# EAGLE board LED glow with HC-SR04 PCB (EAGLE 9.7.0)
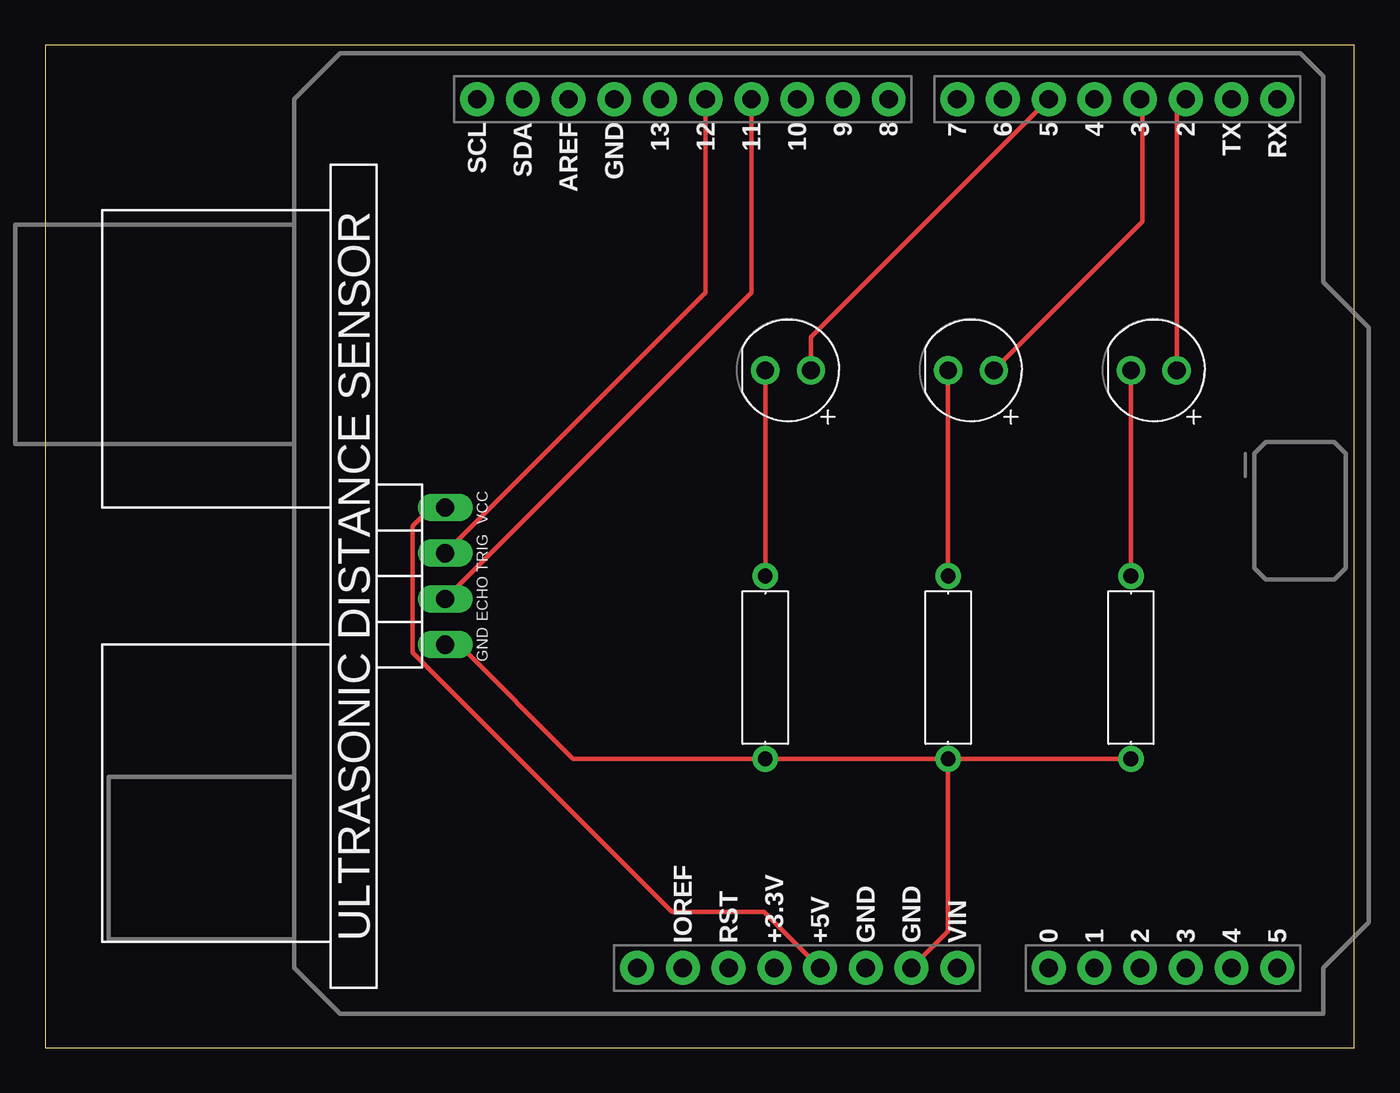
[diagram p0: board, top side]

Size 72.73 x 55.71 mm. Coordinates in mm from the lower left corner, seen from the top.
Outline: 0,0 72.73,0 72.73,55.71 0,55.71 0,0
Copper layers (1*16): Top 0.035mm / dielectric 1.5mm / Bottom 0.035mm
Design rules "default": minimum track width 6mil, minimum drill 0.35mm, track to track 6mil, track to pad 6mil, pad to pad 6mil, via to via 6mil, smd to smd 6mil, copper to edge 40mil, drill to drill 6mil, minimum pad ring 10mil, minimum via ring 8mil, stop-mask expansion 4mil, vias tented up to drill 0mil, thermal gap 10mil

## Footprints (pad centres in the part's own frame; a part is rotated, then mirrored left to right if it is on the bottom)
LEDRD254W60D565H860B = drill 0.981 pad 1.581: 1 -1.27,0; 2 1.27,0
HC-SR04 = drill 1.016 long: 1 -3.81,0; 2 -1.27,0; 3 1.27,0; 4 3.81,0
RESAD1016W63L850D250B = drill 0.83 pad 1.43: 1 -5.08,0; 2 5.08,0
ARDUINO-UNO-R3-SHIELD = drill 1.016 pad 1.88: 3.3V 24.13,-2.54; 5V 24.13,0; A0 24.13,12.7; A1 24.13,15.24; A2 24.13,17.78; A3 24.13,20.32; A4 24.13,22.86; A5 24.13,25.4; AREF -24.13,-13.97; D2 -24.13,20.32; D3 -24.13,17.78; D4 -24.13,15.24; D5 -24.13,12.7; D6 -24.13,10.16; D7 -24.13,7.62; D8 -24.13,3.81; D9 -24.13,1.27; D10 -24.13,-1.27; D11 -24.13,-3.81; D12 -24.13,-6.35; D13 -24.13,-8.89; GND@0 24.13,2.54; GND@1 24.13,5.08; GND@2 -24.13,-11.43; IOREF 24.13,-7.62; NC 24.13,-10.16; RES 24.13,-5.08; RX -24.13,25.4; SCL -24.13,-19.05; SDA -24.13,-16.51; TX -24.13,22.86; VIN 24.13,7.62

## Placement (x,y rotation side)
D1  RED  [LEDRD254W60D565H860B]  61.59,37.65 180 top
D2  RED  [LEDRD254W60D565H860B]  51.44,37.65 180 top
D3  RED  [LEDRD254W60D565H860B]  41.27,37.65 180 top
DIST1  DISTANCE-SENSOR-4PINHC-SR04  [HC-SR04]  22.23,26.22 270 top
R1  220  [RESAD1016W63L850D250B]  60.33,21.14 90 top
R2  220  [RESAD1016W63L850D250B]  50.17,21.14 90 top
R3  220  [RESAD1016W63L850D250B]  40.01,21.14 90 top
U1  ARDUINO-UNO-R3-SHIELD  [ARDUINO-UNO-R3-SHIELD]  43.05,28.57 270 top

## Library data of the parts
D1-D3 = Tinkercad; CATEGORY: Opto-Electronic; SUB-CATEGORY: LED; VALUE: LED_RED
DIST1 R1-R3 U1 = Tinkercad

## Nets
D1_C: D1.2 R1.2
D2_C: D2.2 R2.2
D3_C: D3.2 R3.2
U1_5V: DIST1.1 U1.5V
U1_D2: D1.1 U1.D2
U1_D3: D2.1 U1.D3
U1_D5: D3.1 U1.D5
U1_D11: DIST1.3 U1.D11
U1_D12: DIST1.2 U1.D12
U1_GND: DIST1.4 R1.1 R2.1 R3.1 U1.GND@1

## Tracks (layer width: path | path; a pad name or v marks a point on that pad's centre or on a via)
D1_C
  Top 0.254: D1.2 R1.2
D2_C
  Top 0.254: D2.2 R2.2
D3_C
  Top 0.254: D3.2 R3.2
U1_5V
  Top 0.254: DIST1.1 21.46,30.03 20.42,28.98 20.42,21.97 34.83,7.57 39.93,7.57 U1.5V
U1_D2
  Top 0.254: D1.1 62.86,52.2 U1.D2
U1_D3
  Top 0.254: D2.1 60.96,45.9 60.96,52.57 U1.D3
U1_D5
  Top 0.254: D3.1 42.55,39.5 U1.D5
U1_D11
  Top 0.254: U1.D11 39.24,41.96 DIST1.3
U1_D12
  Top 0.254: U1.D12 36.7,41.96 DIST1.2
U1_GND
  Top 0.254: DIST1.4 22.99,22.41 29.34,16.05 R3.1 R2.1 | R2.1 50.17,6.48 U1.GND@1 | R2.1 R1.1